# EAGLE board TM1637-bord2 (EAGLE 9.1.0)
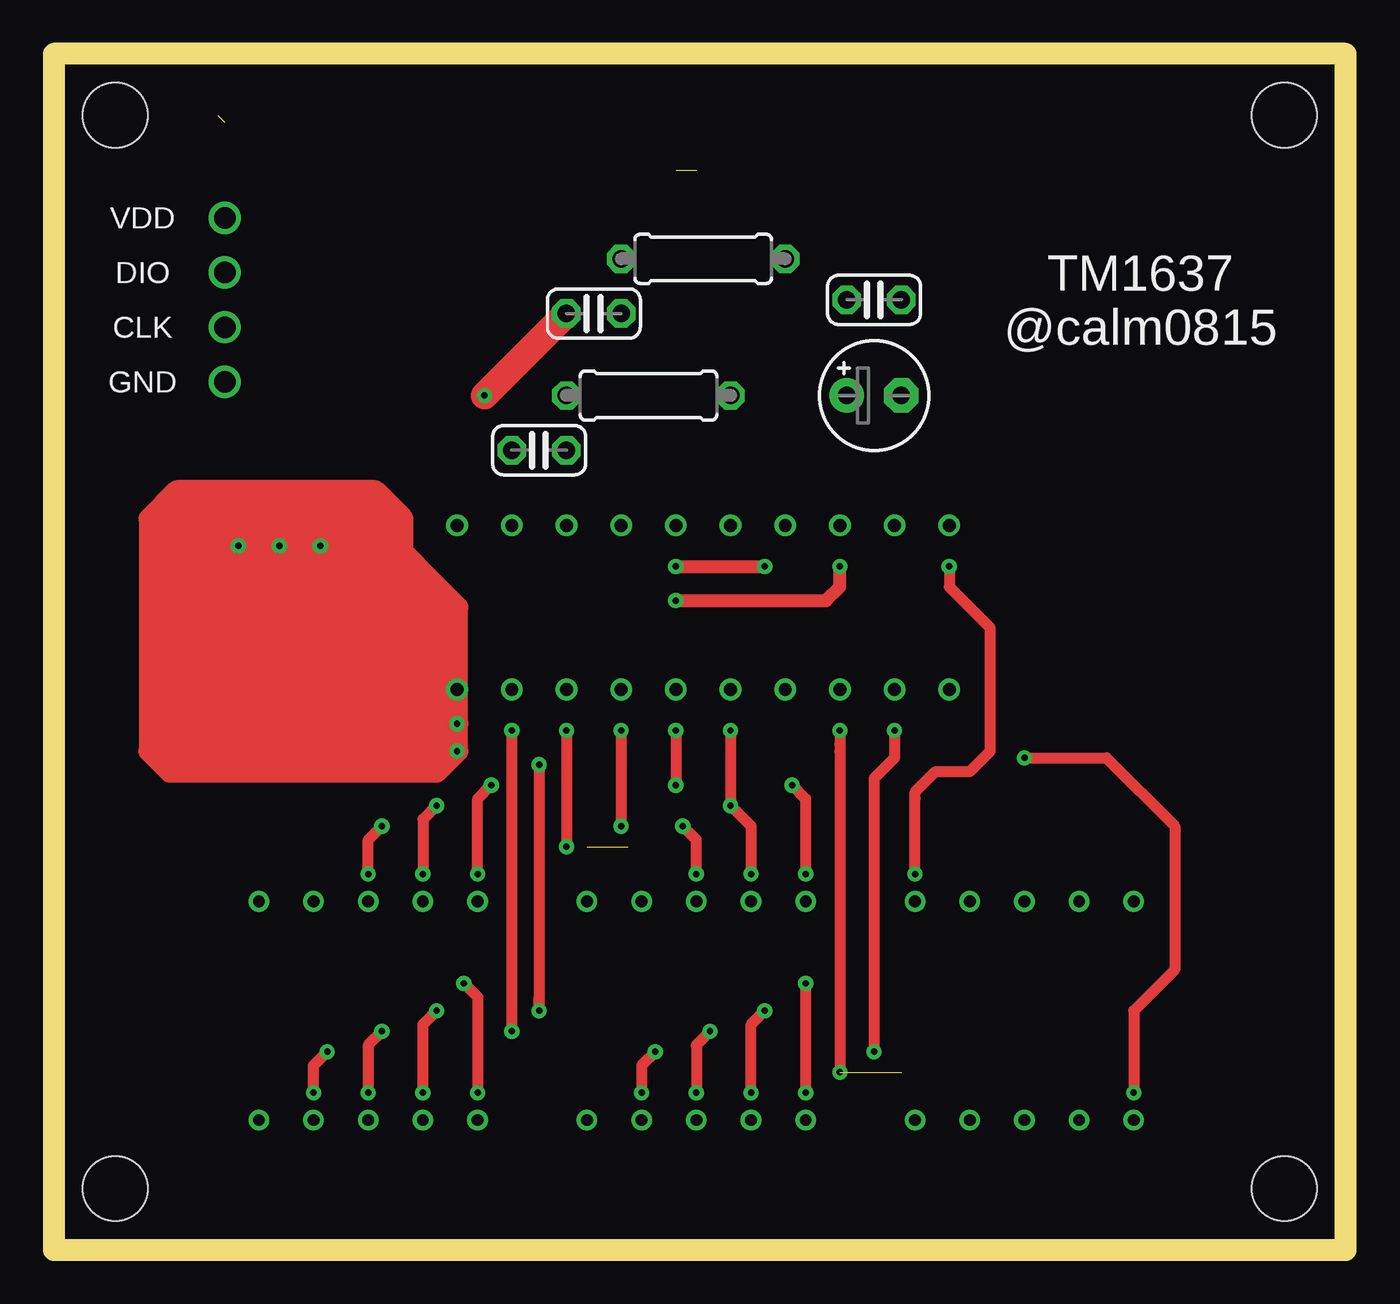
[diagram p0: board, top side]
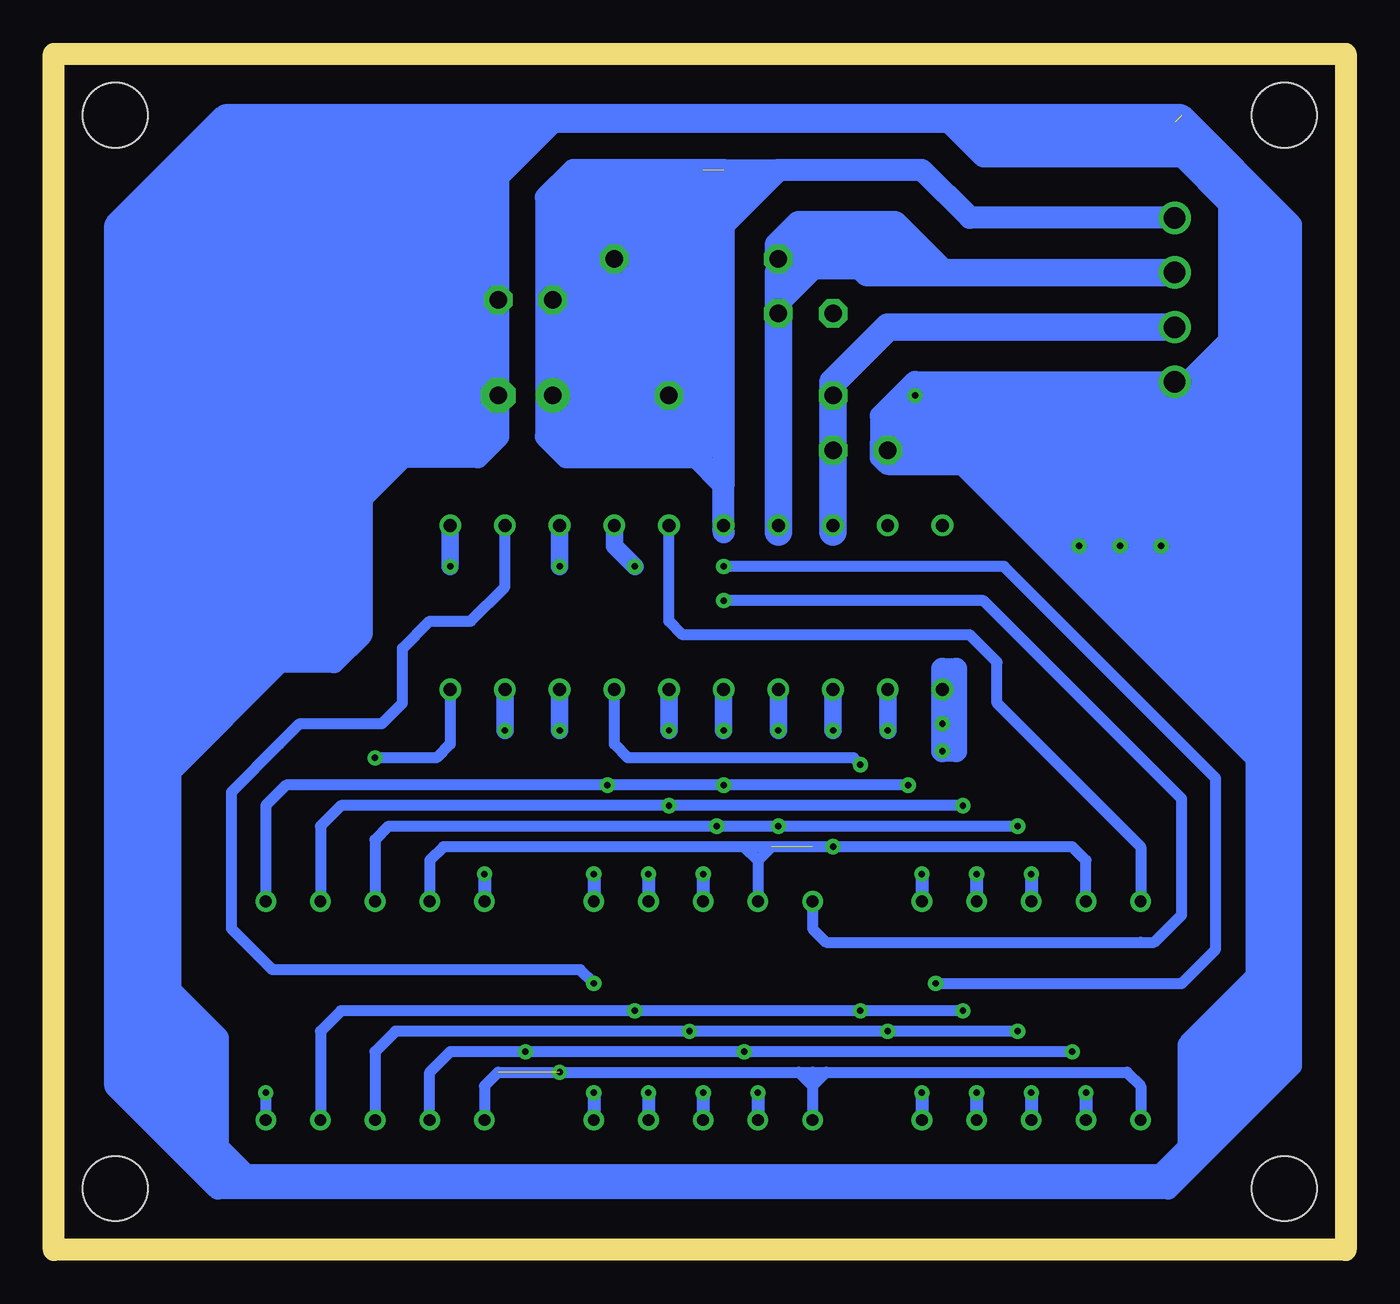
[diagram p1: board, bottom side, seen from below]

Size 60.01 x 55.56 mm. Coordinates in mm from the lower left corner, seen from the top.
Outline: 0,0 60.01,0 60.01,55.56 0,55.56 0,0
Copper layers (1*16): Top 0.035mm / dielectric 1.5mm / Bottom 0.035mm
Design rules "default": minimum track width 6mil, minimum drill 0.35mm, track to track 6mil, track to pad 6mil, pad to pad 6mil, via to via 6mil, smd to smd 6mil, copper to edge 40mil, drill to drill 6mil, minimum pad ring 10mil, minimum via ring 8mil, stop-mask expansion 4mil, vias tented up to drill 0mil, thermal gap 10mil
Holes 3 mm at 2.86,52.7 2.86,2.86 57.15,52.7 57.15,2.86

## Footprints (pad centres in the part's own frame; a part is rotated, then mirrored left to right if it is on the bottom)
0207/7 = drill 0.813 octagon: 1 -3.81,0; 2 3.81,0
E2,5-5 = drill 0.813 pad 1.6: + -1.27,0 | drill 0.813 pad 1.6 octagon: - 1.27,0
C025-024X044 = drill 0.813 octagon: 1 -1.27,0; 2 1.27,0

## Placement (x,y rotation side)
E$1  [0207/7]  30.16,46.04 180 top
E$3  [E2,5-5]  38.1,39.69 0 top
E$4  [C025-024X044]  25.08,43.5 180 top
E$5  [C025-024X044]  38.1,44.13 180 top
E$6  [C025-024X044]  22.54,37.15 180 top
E$9  [0207/7]  27.62,39.69 180 top

## Library data of the parts
E$1 E$9 = resistor
E$3-E$6 = ref-packages

## Nets
S$21: E$6.2
S$23: E$1.2
S$24: E$9.2
S$47: E$4.2

## Tracks (layer width: path | path; a pad name or v marks a point on that pad's centre or on a via)
S$1  (via drill 0.3, 0.55)
  Top 0.508: v14.61,17.46 14.61,19.05 15.24,19.69
  Bottom 0.61: v14.61,17.46 v14.61,16.19
S$2  (via drill 0.55, 0.6)
  Bottom 0.508: v31.43,33.65 31.43,29.21 30.8,28.58 17.46,28.58 16.19,27.3 16.19,25.4 9.53,18.73 v9.53,16.19
S$3  (via drill 0.55)
  other vias: 12.07,6.03
S$4  (via drill 0.3, 0.55)
  Top 0.508: v19.68,17.46 19.68,20.95 v20.32,21.59 | v34.29,21.59 34.92,20.95 v34.92,17.46
  Bottom 0.508: v20.32,21.59 v34.29,21.59 49.21,21.59 50.17,20.64 v50.17,16.19
  Bottom 0.61: v19.68,17.46 v19.68,16.19 | v34.92,17.46 v34.92,16.19
S$5  (via drill 0.3, 0.55)
  Top 0.508: v29.85,17.46 29.85,19.05 29.21,19.69
  Bottom 0.61: v29.85,17.46 v29.85,16.19
S$6  (via drill 0.55)  (2 unrouted)
  Bottom 0.508: 27.94,18.73 24.76,18.73 24.45,18.73 12.7,18.73 12.07,18.1 v12.07,16.19 | 27.94,18.73 41.91,18.73 42.55,18.1 v42.55,16.19 | 26.67,18.73 27.31,18.1 | 27.31,18.1 v27.31,16.19 | 27.31,18.1 27.94,18.73
S$7  (via drill 0.6)
  other vias: 18.73,33.66
S$8
  Bottom 1.016: 18.73,23.18 18.73,26.99 18.1,26.99 18.1,23.18 18.73,23.18
S$9  (via drill 0.3)
  Top 0.508: v50.17,7.3 50.17,11.11 52.07,13.02 52.07,19.69 48.9,22.86 v45.09,22.86
S$10  (via drill 0.6)
  other vias: 21.27,33.66
S$11  (via drill 0.3, 0.55)
  Top 0.508: v15.24,10.16 14.61,9.53 v14.61,7.3
  Bottom 0.508: v15.24,10.16 44.13,10.16 45.09,9.21 v45.09,6.03
  Bottom 0.61: v14.61,7.3 v14.61,6.03
S$12  (via drill 0.55)
  other vias: 40.01,6.03
S$13  (via drill 0.6)
  other vias: 28.89,33.66
S$14  (via drill 0.3, 0.6)
  Bottom 0.508: v22.54,22.54 22.86,22.86 33.34,22.86 33.97,23.5 v33.97,26.04
S$15  (via drill 0.3, 0.55, 0.6)
  Top 0.508: v40.01,17.46 40.01,20.95 40.01,21.27 40.96,22.23 42.55,22.23 43.5,23.18 43.5,28.89 41.59,30.8 v41.59,31.75
  Bottom 0.61: v40.01,17.46 v40.01,16.19
  Bottom 0.813: v41.59,33.65 v41.59,31.75
S$16  (via drill 0.3, 0.6)
  Top 1.016: 17.46,31.12 18.73,29.84 v18.73,24.45 18.73,23.18 17.78,22.23 5.4,22.23 4.45,23.18 4.45,33.97 5.71,35.24 9.21,35.24 14.29,35.24 14.92,35.24 16.19,33.97 16.19,32.38 17.46,31.12 | 17.46,31.12 17.14,31.43
  Bottom 0.813: v18.73,26.04 v18.73,24.45
S$17  (via drill 0.6)
  Bottom 0.508: 45.09,22.86 42.23,22.86 41.59,23.5 v41.59,26.04
S$18  (via drill 0.3, 0.6)
  Top 0.508: v26.35,24.13 v26.35,19.69
  Bottom 0.813: v26.35,26.04 v26.35,24.13
S$19  (via drill 0.3)
  other vias: 18.73,23.18
S$20  (via drill 0.3, 0.55, 0.6)
  Top 0.508: v34.92,12.38 v34.92,7.3
  Bottom 0.508: v34.92,12.38 35.56,13.02 49.85,13.02 51.75,14.92 51.75,17.46 51.75,21.27 49.53,23.5 48.58,24.45 44.77,24.45 43.81,25.4 43.81,27.94 42.55,29.21 40.64,29.21 39.05,30.8 v39.05,33.65
  Bottom 0.61: v34.92,7.3 v34.92,6.03
S$21  (1 unrouted)
  Bottom 1.016: 21.59,37.47 21.59,38.73 20,40.32 7.94,40.32 7.3,40.32 5.4,42.23 5.4,48.26 5.4,48.58 7.62,50.8 8.57,50.8 16.83,50.8 18.42,52.39 | 20.64,36.51 E$6.2 21.59,37.47 | 52.39,4.76 54.61,6.98 54.61,22.23 49.53,27.3 46.99,27.3 45.72,28.58 45.72,34.93 43.81,36.83 40.32,36.83 39.37,37.78 39.37,49.85 36.83,52.39 18.42,52.39 | 52.39,4.76 51.12,3.49 | 51.12,3.49 51.75,3.49 51.44,3.17 50.8,3.17 | 21.59,37.47 21.59,36.83 21.27,36.51 17.78,36.51 4.13,22.86 4.13,7.94 8.57,3.49 51.12,3.49 | 54.93,12.38 52.39,9.84 52.39,4.76 | 7.94,52.39 18.42,52.39 | 4.13,12.7 7.3,9.53 7.3,3.81 | 7.3,3.81 2.54,8.57 2.54,47.62 7.62,52.7 52.07,52.7 57.15,47.62 57.15,7.62 52.39,2.86 8.25,2.86 7.3,3.81
S$22
  Bottom 0.61: 12.07,7.3 12.07,6.03
S$23
  Bottom 1.016: E$1.2 26.35,45.4 | 26.35,37.15 26.35,36.51
  Bottom 1.27: 26.35,45.4 26.35,43.5 | 26.35,43.5 26.35,37.15 26.35,33.34 | 18.42,45.4 18.73,45.4 20.96,47.62 25.4,47.62 26.35,46.67 E$1.2 | 18.42,45.4 7.94,45.4 | 26.35,43.5 26.35,44.13 25.08,45.4 24.76,45.72 22.54,45.72 22.22,45.4 18.42,45.4
S$24
  Bottom 1.016: 23.81,37.15 23.81,36.51
  Bottom 1.27: 7.94,42.86 21.27,42.86 23.81,40.32 E$9.2 23.81,37.15 23.81,33.34
S$25  (via drill 0.55)
  other vias: 9.53,6.03
S$26  (via drill 0.55)
  Bottom 0.61: 27.31,7.3 v27.31,6.03
S$27  (via drill 0.3, 0.6)
  Top 0.508: v21.27,24.13 21.27,10.16
  Bottom 0.813: v21.27,26.04 v21.27,24.13
S$28  (via drill 0.3, 0.6)
  Top 0.508: v28.89,24.13 v28.89,21.59
  Bottom 0.813: v28.89,26.04 v28.89,24.13
S$29  (via drill 0.3)
  other vias: 36.51,8.26
S$30  (via drill 0.3)
  other vias: 12.38,32.7
S$31  (via drill 0.6)
  other vias: 23.81,33.66
S$32  (via drill 0.3, 0.55, 0.6)
  Top 0.508: v32.39,17.46 32.39,19.69 v31.43,20.64 v31.43,24.13
  Bottom 0.61: v32.39,17.46 v32.39,16.19
  Bottom 0.813: v31.43,26.04 v31.43,24.13
S$33  (via drill 0.3)
  other vias: 10.48,32.7
S$34  (via drill 0.3)
  other vias: 8.57,32.7
S$35  (via drill 1)  (1 unrouted)
  Bottom 1.016: 28.89,35.56 28.89,50.17 33.02,50.17 | 28.89,33.34 28.89,35.56 | 28.89,35.56 30.16,36.83 36.19,36.83 37.15,37.78 37.15,48.89 35.88,50.17 32.39,50.17 | 26.35,50.17 19.68,50.17 17.46,47.94 v7.94,47.94 | 29.85,50.17 26.35,50.17 | 26.35,50.17 29.21,47.31
S$37  (via drill 0.3)
  other vias: 21.27,10.16
S$38  (via drill 0.3)
  Top 0.508: 22.54,22.54 22.54,11.75 | 22.54,11.75 22.54,11.43 | v22.54,11.11 22.54,11.75
S$39  (via drill 0.3, 0.55)  (2 unrouted)
  Top 0.508: 36.51,8.26 36.51,23.18 36.51,23.5 v36.51,24.13
  Bottom 0.508: 40.01,6.03 40.01,7.62 39.37,8.26 25.4,8.26 | 25.4,8.26 24.76,8.26 | 9.53,6.03 9.53,7.62 10.16,8.26 24.13,8.26 | 24.76,8.26 24.76,7.62 | 24.76,7.62 v24.76,6.03 | 24.76,8.26 24.13,8.26 | 24.76,7.62 24.13,8.26 | 24.76,7.62 25.4,8.26
S$40  (via drill 0.3, 0.55)
  Top 0.508: v17.14,7.3 17.14,10.48 v17.78,11.11 | v32.39,7.3 32.39,10.48 v33.02,11.11
  Bottom 0.508: v17.78,11.11 v33.02,11.11 46.67,11.11 47.62,10.16 v47.62,6.03
  Bottom 0.61: v17.14,7.3 v17.14,6.03 | v32.39,7.3 v32.39,6.03
S$41  (via drill 0.3)
  Top 0.508: v12.07,7.3 12.07,8.57 12.7,9.21
S$42  (via drill 1)
  other vias: 7.94,45.4
S$43  (via drill 0.55)
  Bottom 0.508: 50.17,7.3 v50.17,6.03
S$45  (via drill 0.3, 0.6)
  Top 0.508: v23.81,24.13 v23.81,18.73
  Bottom 0.813: v23.81,26.04 v23.81,24.13
S$46  (via drill 1)
  other vias: 7.94,42.86
S$47  (via drill 0.3)
  Top 1.27: v20,39.69 E$4.2
S$48  (via drill 0.6)
  Bottom 0.813: v36.51,26.04 36.51,24.13
S$49  (via drill 0.6)
  other vias: 26.35,33.66
S$50  (via drill 0.3, 0.6)
  Top 0.508: v39.05,24.13 39.05,22.86 38.1,21.91 38.1,9.84 38.1,9.21
  Bottom 0.813: v39.05,26.04 v39.05,24.13
S$51  (via drill 0.6)
  Bottom 0.813: 33.02,31.75 33.97,32.7 v33.97,33.65
S$52  (via drill 1)
  other vias: 7.94,40.32
S$55  (via drill 0.3, 0.55)
  Top 0.508: v19.05,12.38 19.68,11.75 v19.68,7.3
  Bottom 0.508: 28.89,31.75 15.87,31.75 6.03,21.91 6.03,13.97 7.62,12.38 v19.05,12.38
  Bottom 0.61: v19.68,7.3 v19.68,6.03
S$56  (via drill 0.55)
  Bottom 0.508: 12.7,9.21 41.59,9.21 42.55,8.26 v42.55,6.03
S$57  (via drill 0.3)
  other vias: 38.1,9.21
S$58  (via drill 0.3)
  other vias: 12.7,9.21
S$59  (via drill 0.3)
  Top 0.508: v27.94,9.21 27.31,8.57 v27.31,7.3
S$60  (via drill 0.3)
  other vias: 29.21,19.69
S$61  (via drill 0.3, 0.55)
  Top 0.508: v30.48,10.16 29.85,9.53 v29.85,7.3
  Bottom 0.61: v29.85,7.3 v29.85,6.03
S$62  (via drill 0.3, 0.55)
  Bottom 0.508: v15.24,19.69 44.45,19.69 45.09,19.05 v45.09,16.19
S$66  (via drill 0.3)
  Top 0.61: v28.89,31.75 v33.02,31.75
S$67  (via drill 0.55)
  Bottom 0.508: v24.76,16.19 24.76,14.92 24.13,14.29 9.53,14.29 8.89,14.29 7.62,15.56 7.62,20.95 16.83,30.16 28.89,30.16
S$68  (via drill 0.3, 0.55)
  Top 0.508: v17.78,20.64 17.14,20 v17.14,17.46
  Bottom 0.508: v17.78,20.64 46.67,20.64 47.62,19.69 v47.62,16.19
  Bottom 0.61: v17.14,17.46 v17.14,16.19
S$69  (via drill 0.3, 0.6)
  Top 0.61: v28.89,30.16 35.88,30.16 36.51,30.8 v36.51,31.75
  Bottom 0.813: v36.51,33.65 v36.51,31.75
(copper drawn outside any net)
  shapes: Bottom area x96, Top area x16

## Text on the board
tNames: VDD | DIO | TM1637 / @calm0815 | CLK | GND